# EAGLE board datalogger_v1 (EAGLE 7.2.0)

Size 100 x 80 mm. Coordinates in mm from the lower left corner, seen from the top.
Outline: 0,0 100,0 100,80 0,80 0,0
Copper layers (1*16): Top 0.035mm / dielectric 1.5mm / Bottom 0.035mm
Design rules "default": minimum track width 10mil, minimum drill 24mil, track to track 8mil, track to pad 8mil, pad to pad 8mil, via to via 8mil, smd to smd 8mil, copper to edge 40mil, drill to drill 8mil, minimum pad ring 10mil, minimum via ring 8mil, stop-mask expansion 4mil, vias tented up to drill 0mil, thermal gap 10mil

## Footprints (pad centres in the part's own frame; a part is rotated, then mirrored left to right if it is on the bottom)
1X02_LOCK = drill 1.016 pad 1.88: 1 -0.178,0; 2 2.718,0
BATTCON_12MM = smd 3.962 x 3.962: GND 0,0 | smd 3.175 x 3.175: PWR@1 -7.874,0; PWR@2 7.874,0
C0805-N = smd 1.15 x 1.45: 1 -0.9,0; 2 0.9,0
C0603-N = smd 0.95 x 1: 1 -0.8,0; 2 0.8,0
EN_J2 = smd 5 x 1.6: + 0,-3.2 | smd 5 x 2.4: - 0,2.8
LED-0603 = smd 1 x 1: A 0,-0.877; C 0,0.877
SOT23-3 = smd 0.8 x 0.9: 1 -0.95,-1; 2 0.95,-1; 3 0,1.1
1X06_LOCK = drill 1.016 pad 1.88: 1 0,0; 2 2.54,-0.254; 3 5.08,0; 4 7.62,-0.254; 5 10.16,0; 6 12.7,-0.254
2X3-NS = drill 1.016 pad 1.88 square: 1 -2.54,-1.27 | drill 1.016 pad 1.88 octagon: 2 -2.54,1.27; 3 0,-1.27; 4 0,1.27; 5 2.54,-1.27; 6 2.54,1.27
MICRO-SD-SOCKET-PP = smd 1.8 x 1.4: CD1 -2.05,0.4; CD2 -7.75,0.4 | smd 0.8 x 1.5: CS -7.84,10.3; DI -6.74,10.7; DO -2.34,10.7; GND -3.44,10.9; RSV1 -8.94,10.7; RSV2 -1.24,10.7; SCLK -4.54,10.7; VCC -5.64,10.9 | smd 1.4 x 1.9: GND1 -13.6,14.55; GND3 -0.45,13.55
CR75 = smd 1.75 x 4.7: P$1 0,0; P$2 6.05,0
R0603-N = smd 0.95 x 1: 1 -0.8,0; 2 0.8,0
TRIMPOT-5MM-V2 = smd 1.3 x 1.3: A 1.15,-2.54; C -1.15,-2.54 | smd 1.402 x 2: B 0,3.239
TACTILE_SWITCH_SMD_4.6X2.8MM = smd 0.9 x 1: 1 -2.05,-0.8; 2 2.05,-0.8; 3 2.05,0.8; 4 -2.05,0.8
1X03_LOCK = drill 1.016 pad 1.88: 1 0,0.127; 2 2.54,-0.127; 3 5.08,0.127
SOT-23 = smd 0.787 x 0.889: 1 0.025,-1.016; 2 -0.94,1.016; 3 0.991,1.016
TQFP32-08 = smd 1.27 x 0.559: 1 -4.293,2.8; 2 -4.293,2; 3 -4.293,1.2; 4 -4.293,0.4; 5 -4.293,-0.4; 6 -4.293,-1.2; 7 -4.293,-2; 8 -4.293,-2.8; 17 4.293,-2.8; 18 4.293,-2; 19 4.293,-1.2; 20 4.293,-0.4; 21 4.293,0.4; 22 4.293,1.2; 23 4.293,2; 24 4.293,2.8 | smd 0.559 x 1.27: 9 -2.8,-4.293; 10 -2,-4.293; 11 -1.2,-4.293; 12 -0.4,-4.293; 13 0.4,-4.293; 14 1.2,-4.293; 15 2,-4.293; 16 2.8,-4.293; 25 2.8,4.293; 26 2,4.293; 27 1.2,4.293; 28 0.4,4.293; 29 -0.4,4.293; 30 -1.2,4.293; 31 -2,4.293; 32 -2.8,4.293
RFM69HCW-XXXS2 = smd 3 x 1.2: 1 -7.5,7; 2 -7.5,5; 3 -7.5,3; 4 -7.5,1; 5 -7.5,-1; 6 -7.5,-3; 7 -7.5,-5; 8 -7.5,-7; 9 7.5,-7; 10 7.5,-5; 11 7.5,-3; 12 7.5,-1; 13 7.5,1; 14 7.5,3; 15 7.5,5; 16 7.5,7
MSOP-12_GND = smd 0.889 x 0.42: 1 -2.1,1.625; 2 -2.1,0.975; 3 -2.1,0.325; 4 -2.1,-0.325; 5 -2.1,-0.975; 6 -2.1,-1.625; 7 2.1,-1.625; 8 2.1,-0.975; 9 2.1,-0.325; 10 2.1,0.325; 11 2.1,0.975; 12 2.1,1.625 | smd 1.651 x 2.845: 13 0,0
SO08 = smd 0.66 x 2.032: 1 -1.905,-3.073; 2 -0.635,-3.073; 3 0.635,-3.073; 4 1.905,-3.073; 5 1.905,3.073; 6 0.635,3.073; 7 -0.635,3.073; 8 -1.905,3.073
DFN200X200X80-7N = smd 0.737 x 0.305: 1 -0.991,0.508; 2 -0.991,0; 3 -0.991,-0.508; 4 0.991,-0.508; 5 0.991,0; 6 0.991,0.508 | smd 0.61 x 1.422: 7 0,0
SOT223 = smd 1.219 x 2.235: 1 -2.311,-3.099; 2 0,-3.099; 3 2.311,-3.099 | smd 3.6 x 2.2: 4 0,3.099
ADAFRUIT_U.FL = smd 2.2 x 1.05: 1 0,1.375; 2 0,-1.375 | smd 0.8 x 1: 3 1.525,0

## Placement (x,y rotation side)
3-5V  [1X02_LOCK]  -52.07,66.04 0 top  (outside the outline)
>20V  [1X02_LOCK]  -58.42,66.04 0 top  (outside the outline)
BAT1  [BATTCON_12MM]  -22.86,30.48 0 top  (outside the outline)
C1  10µF  [C0805-N]  -19.05,71.12 0 top  (outside the outline)
C2  10µF  [C0805-N]  -24.13,71.12 0 top  (outside the outline)
C3  1µF  [C0603-N]  -43.18,71.12 0 top  (outside the outline)
C4  1µF  [C0603-N]  -46.99,71.12 0 top  (outside the outline)
C5  4.7µF  [C0603-N]  -50.8,71.12 0 top  (outside the outline)
C6  0.1µF  [C0603-N]  -54.61,71.12 0 top  (outside the outline)
C7  10µF  [C0805-N]  -29.21,71.12 0 top  (outside the outline)
C8  0.1µF  [C0603-N]  -58.42,71.12 0 top  (outside the outline)
C9  0.1µF  [C0603-N]  -62.23,71.12 0 top  (outside the outline)
C10  0.1µF  [C0603-N]  -66.04,71.12 0 top  (outside the outline)
C11  0.1µF  [C0603-N]  -69.85,71.12 0 top  (outside the outline)
C12  0.1µF  [C0603-N]  -73.66,71.12 0 top  (outside the outline)
C13  0.1µF  [C0603-N]  -77.47,71.12 0 top  (outside the outline)
C14  0.1µF  [C0603-N]  -15.24,74.93 0 top  (outside the outline)
C15  10µF  [C0805-N]  -34.29,71.12 0 top  (outside the outline)
C16  1µF  [C0603-N]  -19.05,74.93 0 top  (outside the outline)
C17  1µF  [C0603-N]  -22.86,74.93 0 top  (outside the outline)
C18  47µF  [EN_J2]  -16.51,59.69 0 top  (outside the outline)
C19  47µF  [EN_J2]  -24.13,59.69 0 top  (outside the outline)
C20  10µF  [C0805-N]  -39.37,71.12 0 top  (outside the outline)
D1  [LED-0603]  -26.67,78.74 0 top  (outside the outline)
D2  ZLLS500  [SOT23-3]  -74.93,66.04 0 top  (outside the outline)
D3  ZLLS500  [SOT23-3]  -15.24,71.12 0 top  (outside the outline)
D4  [LED-0603]  -29.21,78.74 0 top  (outside the outline)
D5  [LED-0603]  -31.75,78.74 0 top  (outside the outline)
J1  [1X02_LOCK]  -64.77,66.04 0 top  (outside the outline)
J2  [1X06_LOCK]  -27.94,66.04 0 top  (outside the outline)
J3  AVR_SPI_PRG_6NS  [2X3-NS]  -57.15,29.21 0 top  (outside the outline)
JP1  USD-SOCKETNEW  [MICRO-SD-SOCKET-PP]  -22.86,1.27 0 top  (outside the outline)
L1  68uH  [CR75]  -41.91,58.42 0 top  (outside the outline)
R1  100k  [R0603-N]  -26.67,74.93 0 top  (outside the outline)
R2  100k  [R0603-N]  -30.48,74.93 0 top  (outside the outline)
R3  100k  [R0603-N]  -34.29,74.93 0 top  (outside the outline)
R4  10k  [R0603-N]  -38.1,74.93 0 top  (outside the outline)
R5  10k  [R0603-N]  -41.91,74.93 0 top  (outside the outline)
R6  10k  [R0603-N]  -45.72,74.93 0 top  (outside the outline)
R7  470  [R0603-N]  -49.53,74.93 0 top  (outside the outline)
R8  10k  [R0603-N]  -53.34,74.93 0 top  (outside the outline)
R9  THERM  [R0603-N]  -57.15,74.93 0 top  (outside the outline)
R10  33k  [R0603-N]  -60.96,74.93 0 top  (outside the outline)
R11  6.8k  [R0603-N]  -64.77,74.93 0 top  (outside the outline)
R12  [TRIMPOT-5MM-V2]  -31.75,58.42 0 top  (outside the outline)
R13  0.22  [R0603-N]  -68.58,74.93 0 top  (outside the outline)
R14  220k  [R0603-N]  -72.39,74.93 0 top  (outside the outline)
R15  47k  [R0603-N]  -76.2,74.93 0 top  (outside the outline)
R16  220k  [R0603-N]  -15.24,78.74 0 top  (outside the outline)
R17  10k  [R0603-N]  -19.05,78.74 0 top  (outside the outline)
R18  10k  [R0603-N]  -22.86,78.74 0 top  (outside the outline)
S1  RST  [TACTILE_SWITCH_SMD_4.6X2.8MM]  -63.5,57.15 0 top  (outside the outline)
SOURCE_SELECT  [1X03_LOCK]  -45.72,66.04 0 top  (outside the outline)
T1  [SOT-23]  -45.72,57.15 0 top  (outside the outline)
T2  [SOT-23]  -49.53,57.15 0 top  (outside the outline)
T3  [SOT-23]  -53.34,57.15 0 top  (outside the outline)
U1  ATMEGA328P_TQFP  [TQFP32-08]  -73.66,7.62 0 top  (outside the outline)
U2  RFM69HCW  [RFM69HCW-XXXS2]  -58.42,8.89 0 top  (outside the outline)
U3  LT3652  [MSOP-12_GND]  -69.85,66.04 0 top  (outside the outline)
U$1  DS3231M  [SO08]  -38.1,27.94 0 top  (outside the outline)
U$2  LTC3240-3.3VDFN-7  [DFN200X200X80-7N]  -38.1,40.64 0 top  (outside the outline)
U$3  NCP1117-3.3V-SOT-223  [SOT223]  -43.18,5.08 0 top  (outside the outline)
X1  [ADAFRUIT_U.FL]  -58.42,57.15 0 top  (outside the outline)

## Library data of the parts
3-5V >20V J1-J3 SOURCE_SELECT = SparkFun-Connectors
BAT1 = riffle-beta-0.1.8
C1-C17 C20 R1-R11 R13-R18 = passives-7351
C18 C19 = SparkFun-Capacitors
D1 D4 D5 = SparkFun-LED
D2 D3 = SparkFun-DiscreteSemi; PROD_ID: DIO-08411
JP1 = SparkFun-Connectors; PROD_ID: CONN-07820
L1 = SparkFun-Passives; PROD_ID: NDUC-09739
R12 = SparkFun-Electromechanical
S1 = SparkFun-Electromechanical; PROD_ID: SWCH-13065
T1-T3 = riffle-beta-0.1.8; OC_FARNELL: unknown; OC_NEWARK: unknown
U1 = SparkFun-DigitalIC; PROD_ID: IC-09069
U2 = SparkFun-RF; PROD_ID: IC-11997, IC-12053
U3 = SparkFun-PowerIC
U$1-U$3 = _my-parts
X1 = MoteinoMEGA

## Nets
3.3V: C6.1 C7.1 C8.1 C14.1 J3.2 R4.2 R5.2 R6.2 SOURCE_SELECT.2 T1.2 T2.2 U1.4 U1.6 U1.18 U2.13 U$1.2
20V: >20V.2 C1.1 U$3.3
ANT: U2.9 X1.3
BAT_DIV: R10.1 R11.2 U1.23
BAT_EN: T3.3 U1.10
CD: JP1.CD2 U1.13
CHRG: R18.2 U3.4
D_3: U1.1 U$1.3
FLT: R17.2 U3.5
GND: 3-5V.1 >20V.1 BAT1.GND C1.2 C2.2 C4.1 C5.1 C6.2 C7.2 C8.2 C9.2 C10.1 C11.1 C13.1 C14.2 C15.1 C16.1 C18.- C19.- C20.2 D3.1 J1.1 J2.6 J3.6 JP1.GND JP1.GND1 JP1.GND3 R7.1 R9.1 R11.1 R12.C R16.2 S1.1 S1.2 U1.3 U1.5 U1.21 U2.1 U2.8 U2.10 U3.13 U$1.5 U$2.1 U$2.7 U$3.1 X1.1 X1.2
INT: U1.32 U2.14
MISO: J3.1 JP1.DO U1.16 U2.2
MOSI: J3.4 JP1.DI U1.15 U2.3
N$1: BAT1.PWR@1 U$1.6
N$2: C12.1 J2.1
N$3: C2.1 SOURCE_SELECT.1 U$3.2 U$3.4
N$4: C11.2 R10.2 T3.1
N$5: JP1.CD1 R1.1
N$7: JP1.RSV2 R2.1
N$8: C17.1 D3.3 L1.P$1 U3.12
N$9: C10.2 R8.2 T2.1
N$10: C3.1 U$2.5
N$11: C3.2 U$2.4
N$12: C13.2 U1.20
N$13: L1.P$2 R13.2 U3.10
N$14: C5.2 SOURCE_SELECT.3 U$2.3
N$15: R12.B U3.2
N$17: JP1.RSV1 R3.1
N$18: C16.2 U3.6
N$21: D1.A U1.2
N$22: C17.2 D2.3 U3.11
N$23: R14.1 U3.7
N$24: R14.2 R15.2 R16.1
N$26: D1.C R7.2
N$29: D4.C R18.1
N$30: D5.C R17.1
N$33: C9.1 JP1.VCC R1.2 R2.2 R3.2 T1.1
RST: C12.2 J3.5 R6.1 S1.3 S1.4 U1.29
RX: J2.3 U1.30
SCK: J3.3 JP1.SCLK U1.17 U2.4
SCL: R4.1 U1.28 U$1.8
SD_CS: JP1.CS U1.12
SD_EN: T1.3 U1.11
SDA: R5.1 U1.27 U$1.7
SS: U1.14 U2.5
THERM: R8.1 R9.2 U1.24
THERM_EN: T2.3 U1.9
TX: J2.2 U1.31
V_BAT: 3-5V.2 C4.2 C18.+ C19.+ C20.1 D2.1 R13.1 R15.1 T3.2 U3.9 U$2.2 U$2.6
V_SOL: C15.2 D4.A D5.A J1.2 R12.A U3.1 U3.3

## Tracks (layer width: path | path; a pad name or v marks a point on that pad's centre or on a via)
3.3V  (15 unrouted)
20V  (2 unrouted)
ANT  (1 unrouted)
BAT_DIV  (2 unrouted)
BAT_EN  (1 unrouted)
CD  (1 unrouted)
CHRG  (1 unrouted)
D_3  (1 unrouted)
FLT  (1 unrouted)
GND  (46 unrouted)
INT  (1 unrouted)
MISO  (3 unrouted)
MOSI  (3 unrouted)
N$1  (1 unrouted)
N$2  (1 unrouted)
N$3  (3 unrouted)
N$4  (2 unrouted)
N$5  (1 unrouted)
N$7  (1 unrouted)
N$8  (3 unrouted)
N$9  (2 unrouted)
N$10  (1 unrouted)
N$11  (1 unrouted)
N$12  (1 unrouted)
N$13  (2 unrouted)
N$14  (2 unrouted)
N$15  (1 unrouted)
N$17  (1 unrouted)
N$18  (1 unrouted)
N$21  (1 unrouted)
N$22  (2 unrouted)
N$23  (1 unrouted)
N$24  (2 unrouted)
N$26  (1 unrouted)
N$29  (1 unrouted)
N$30  (1 unrouted)
N$33  (5 unrouted)
RST  (5 unrouted)
RX  (1 unrouted)
SCK  (3 unrouted)
SCL  (2 unrouted)
SD_CS  (1 unrouted)
SD_EN  (1 unrouted)
SDA  (2 unrouted)
SS  (1 unrouted)
THERM  (2 unrouted)
THERM_EN  (1 unrouted)
TX  (1 unrouted)
V_BAT  (11 unrouted)
V_SOL  (6 unrouted)